# EAGLE board Traffic Light Contoller v10 (EAGLE 5.03)
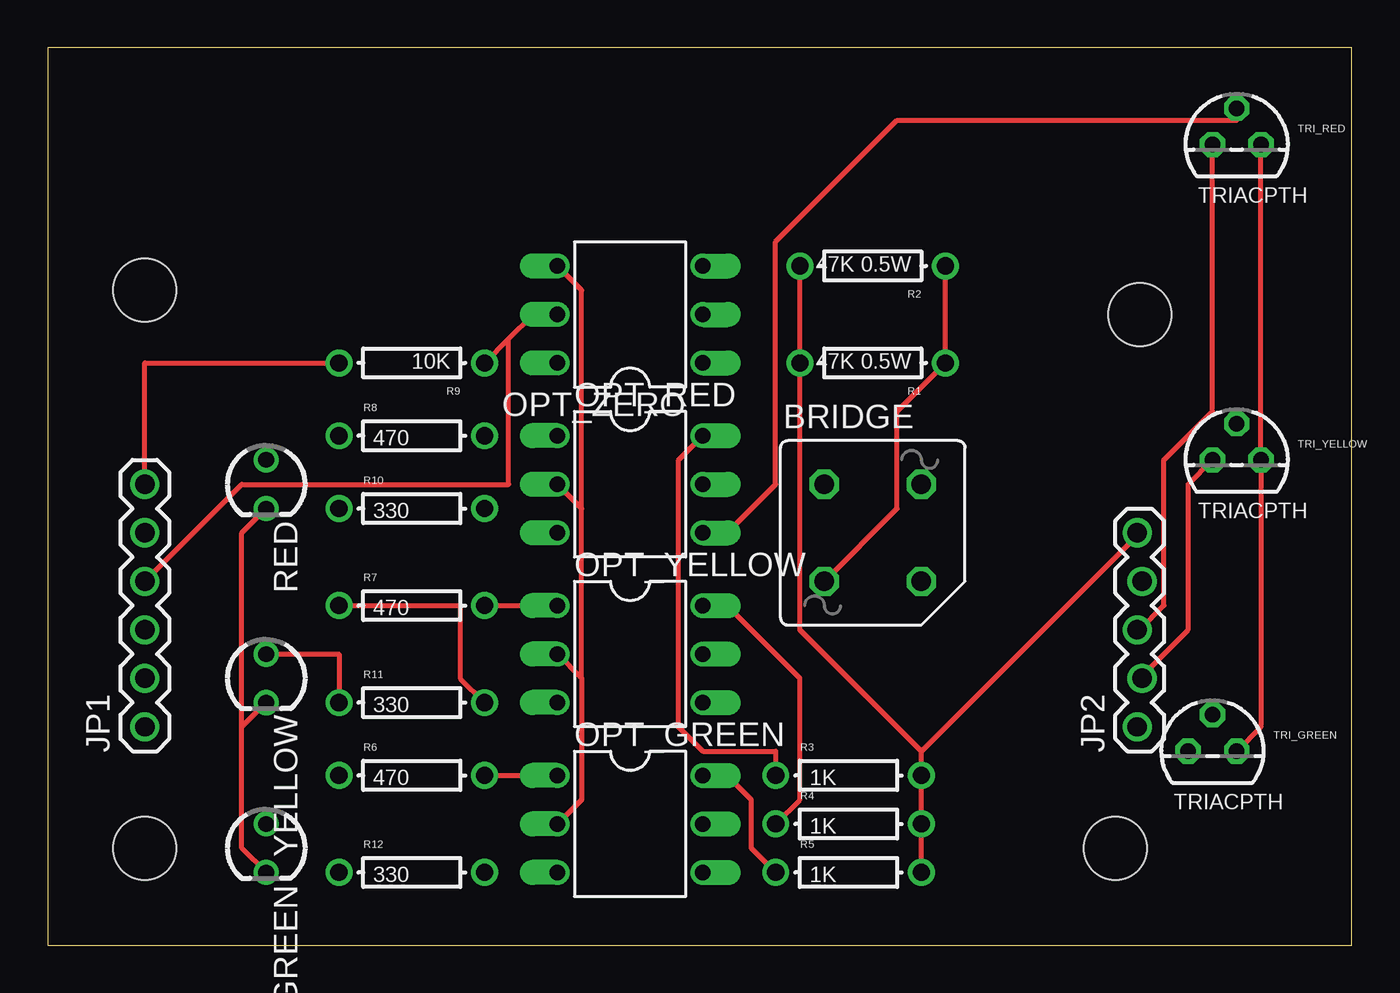
[diagram p0: board, top side]
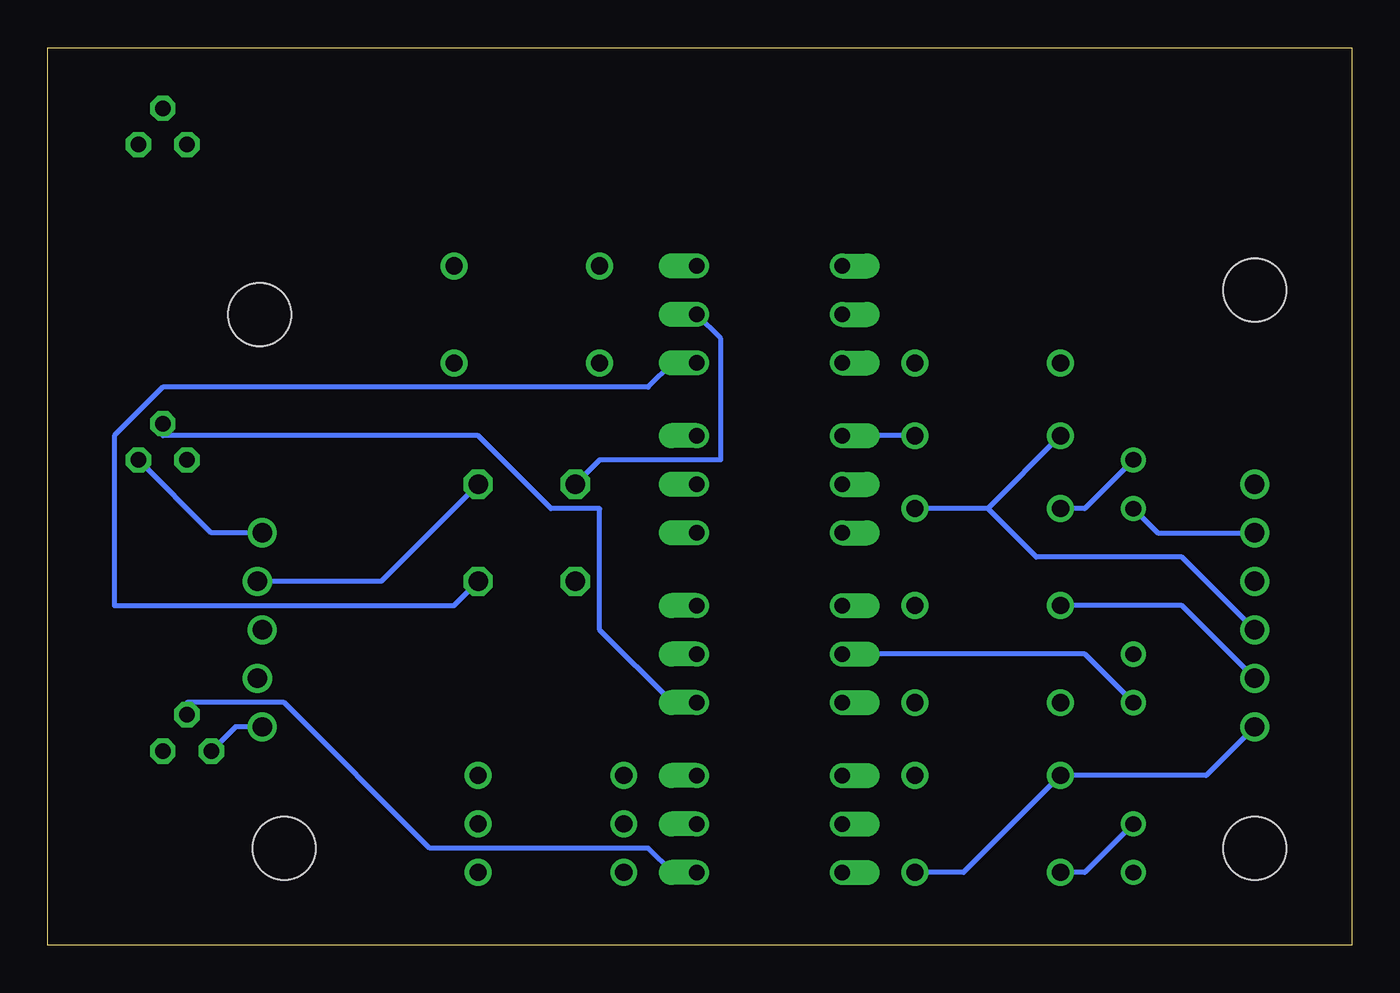
[diagram p1: board, bottom side, seen from below]

Size 68.25 x 46.98 mm. Coordinates in mm from the lower left corner, seen from the top.
Outline: 0,0 68.25,0 68.25,46.98 0,46.98 0,0
Copper layers (1*16): Top 0.035mm / dielectric 1.5mm / Bottom 0.035mm
Design rules "default": minimum track width 10mil, minimum drill 24mil, track to track 8mil, track to pad 8mil, pad to pad 8mil, via to via 8mil, smd to smd 8mil, copper to edge 40mil, drill to drill 8mil, minimum pad ring 10mil, minimum via ring 8mil, stop-mask expansion 4mil, vias tented up to drill 0mil, thermal gap 10mil

## Footprints (pad centres in the part's own frame; a part is rotated, then mirrored left to right if it is on the bottom)
1KAB = drill 1.016 octagon: + 2.54,-2.54; - -2.54,2.54; AC1 -2.54,-2.54; AC2 2.54,2.54
LED3MM = drill 0.813 round: A -1.27,0; K 1.27,0
1X06 = drill 1.016 round: 1 0,0; 2 2.54,0; 3 5.08,0; 4 7.62,0; 5 10.16,0; 6 12.7,0
1X05_LOCK = drill 1.016 round: 1 0,0.127; 2 2.54,-0.127; 3 5.08,0.127; 4 7.62,-0.127; 5 10.16,0.127
DIL06 = drill 0.813 offset: 1 -2.54,-3.81; 2 0,-3.81; 3 2.54,-3.81; 4 2.54,3.81; 5 0,3.81; 6 -2.54,3.81
AXIAL-0.3 = drill 0.9 round: P$1 -3.81,0; P$2 3.81,0
TO-92 = drill 0.813 octagon: 1 -1.27,0; 2 0,1.905; 3 1.27,0
STAND-OFF = hole 3.302: 0,0

## Placement (x,y rotation side)
BRIDGE  1A  [1KAB]  43.18,21.59 0 top
GREEN  [LED3MM]  11.43,5.08 270 top
JP1  [1X06]  5.08,11.43 90 top
JP2  [1X05_LOCK]  57.15,11.43 90 top
OPT_GREEN  MOC3010M  [DIL06]  30.48,6.35 270 top
OPT_RED  MOC3010M  [DIL06]  30.48,24.13 270 top
OPT_YELLOW  MOC3010M  [DIL06]  30.48,15.24 270 top
OPT_ZERO  4N25M  [DIL06]  30.48,33.02 90 top
R1  47K 0.5W  [AXIAL-0.3]  43.18,30.48 180 top
R2  47K 0.5W  [AXIAL-0.3]  43.18,35.56 180 top
R3  1K  [AXIAL-0.3]  41.91,8.89 0 top
R4  1K  [AXIAL-0.3]  41.91,6.35 0 top
R5  1K  [AXIAL-0.3]  41.91,3.81 0 top
R6  470  [AXIAL-0.3]  19.05,8.89 0 top
R7  470  [AXIAL-0.3]  19.05,17.78 0 top
R8  470  [AXIAL-0.3]  19.05,26.67 0 top
R9  10K  [AXIAL-0.3]  19.05,30.48 180 top
R10  330  [AXIAL-0.3]  19.05,22.86 0 top
R11  330  [AXIAL-0.3]  19.05,12.7 0 top
R12  330  [AXIAL-0.3]  19.05,3.81 0 top
RED  [LED3MM]  11.43,24.13 270 top
TRI_GREEN  TRIACPTH  [TO-92]  60.96,10.16 0 top
TRI_RED  TRIACPTH  [TO-92]  62.23,41.91 0 top
TRI_YELLOW  TRIACPTH  [TO-92]  62.23,25.4 0 top
U$1  [STAND-OFF]  57.15,33.02 0 top
U$2  [STAND-OFF]  5.08,34.29 0 top
U$3  [STAND-OFF]  55.88,5.08 0 top
U$6  [STAND-OFF]  5.08,5.08 0 top
YELLOW  [LED3MM]  11.43,13.97 270 top

## Library data of the parts
BRIDGE = rectifier
GREEN JP1 JP2 R1-R12 RED TRI_GREEN TRI_RED TRI_YELLOW U$1-U$3 U$6 YELLOW = SparkFun
OPT_GREEN OPT_RED OPT_YELLOW OPT_ZERO = optocoupler

## Nets
5V: JP1.6 R9.P$2
GND: GREEN.K JP1.5 OPT_GREEN.2 OPT_RED.2 OPT_YELLOW.2 OPT_ZERO.4 RED.K YELLOW.K
GREEN_HOT: JP2.1 TRI_GREEN.1
IN_ZERO: JP1.4 OPT_ZERO.5 R9.P$1
MAIN_HOT: JP2.5 R1.P$2 R2.P$2 R3.P$2 R4.P$2 R5.P$2 TRI_GREEN.3 TRI_RED.3 TRI_YELLOW.3
N$1: BRIDGE.- OPT_ZERO.2
N$2: BRIDGE.+ OPT_ZERO.1
N$3: BRIDGE.AC1 R1.P$1 R2.P$1
N$6: OPT_RED.6 R3.P$1
N$7: OPT_YELLOW.1 R7.P$2
N$8: OPT_GREEN.1 R6.P$2
N$9: OPT_YELLOW.6 R4.P$1
N$10: OPT_GREEN.6 R5.P$1
N$11: R10.P$1 RED.A
N$12: R11.P$1 YELLOW.A
N$13: GREEN.A R12.P$1
N$14: OPT_RED.1 R8.P$2
N$21: OPT_GREEN.4 TRI_GREEN.2
N$22: OPT_YELLOW.4 TRI_YELLOW.2
N$23: OPT_RED.4 TRI_RED.2
NEUTRAL: BRIDGE.AC2 JP2.4
OUT_GREEN: JP1.1 R6.P$1 R12.P$2
OUT_RED: JP1.3 R8.P$1 R10.P$2
OUT_YELLOW: JP1.2 R7.P$1 R11.P$2
RED_HOT: JP2.3 TRI_RED.1
YELLOW_HOT: JP2.2 TRI_YELLOW.1

## Tracks (layer width: path | path; a pad name or v marks a point on that pad's centre or on a via)
5V
  Top 0.254: R9.P$2 5.08,30.48 JP1.6
GND
  Top 0.254: GREEN.K 10.16,5.08 10.16,11.43 | 10.16,11.43 YELLOW.K | RED.K 10.16,21.59 10.16,11.43 | OPT_GREEN.2 27.94,7.62 27.94,13.97 | OPT_YELLOW.2 27.94,13.97 | 27.94,22.86 OPT_RED.2 | 27.94,13.97 27.94,22.86 | OPT_ZERO.4 27.94,34.29 27.94,22.86
  Bottom 0.254: RED.K 10.16,21.59 JP1.5 | YELLOW.K 13.97,15.24 OPT_YELLOW.2
GREEN_HOT
  Bottom 0.254: TRI_GREEN.1 58.42,11.43 JP2.1
IN_ZERO
  Top 0.254: 24.13,31.75 R9.P$1 | 24.13,31.75 25.4,33.02 OPT_ZERO.5 | JP1.4 10.16,24.13 24.13,24.13 24.13,31.75
MAIN_HOT
  Top 0.254: TRI_GREEN.3 63.5,11.43 TRI_YELLOW.3 TRI_RED.3 | R2.P$2 R1.P$2 39.37,16.51 45.72,10.16 | R5.P$2 R4.P$2 R3.P$2 45.72,10.16 | 45.72,10.16 57.15,21.59 JP2.5
  Bottom 0.254: TRI_YELLOW.3 59.69,21.59 JP2.5
N$1
  Bottom 0.254: OPT_ZERO.2 33.02,31.75 33.02,25.4 39.37,25.4 BRIDGE.-
N$2
  Bottom 0.254: BRIDGE.+ 46.99,17.78 64.77,17.78 64.77,26.67 62.23,29.21 36.83,29.21 35.56,30.48 OPT_ZERO.1
N$3
  Top 0.254: R2.P$1 R1.P$1 44.45,27.94 44.45,22.86 BRIDGE.AC1
N$6
  Top 0.254: OPT_RED.6 33.02,25.4 33.02,11.43 34.29,10.16 38.1,10.16 R3.P$1
N$7
  Top 0.254: R7.P$2 OPT_YELLOW.1
N$8
  Top 0.254: R6.P$2 OPT_GREEN.1
N$9
  Top 0.254: R4.P$1 39.37,7.62 39.37,13.97 35.56,17.78 OPT_YELLOW.6
N$10
  Top 0.254: R5.P$1 36.83,5.08 36.83,7.62 35.56,8.89 OPT_GREEN.6
N$11
  Bottom 0.254: RED.A 13.97,22.86 R10.P$1
N$12
  Top 0.254: YELLOW.A 15.24,15.24 R11.P$1
N$13
  Bottom 0.254: GREEN.A 13.97,3.81 R12.P$1
N$14
  Bottom 0.254: R8.P$2 OPT_RED.1
N$21
  Bottom 0.254: OPT_GREEN.4 35.56,3.81 36.83,5.08 48.26,5.08 55.88,12.7 60.96,12.7 TRI_GREEN.2
N$22
  Bottom 0.254: OPT_YELLOW.4 35.56,12.7 39.37,16.51 39.37,22.86 41.91,22.86 45.72,26.67 62.23,26.67 TRI_YELLOW.2
N$23
  Top 0.254: OPT_RED.4 35.56,21.59 38.1,24.13 38.1,36.83 44.45,43.18 62.23,43.18 TRI_RED.2
NEUTRAL
  Bottom 0.254: BRIDGE.AC2 50.8,19.05 JP2.4
OUT_GREEN
  Bottom 0.254: R12.P$2 20.32,3.81 R6.P$1 7.62,8.89 JP1.1
OUT_RED
  Bottom 0.254: 19.05,22.86 R8.P$1 | 19.05,22.86 R10.P$2 | JP1.3 8.89,20.32 16.51,20.32 19.05,22.86
OUT_YELLOW
  Top 0.254: R7.P$1 21.59,17.78 21.59,13.97 R11.P$2
  Bottom 0.254: JP1.2 8.89,17.78 R7.P$1
RED_HOT
  Top 0.254: TRI_RED.1 60.96,27.94 58.42,25.4 58.42,17.78 57.15,16.51 JP2.3
YELLOW_HOT
  Top 0.254: TRI_YELLOW.1 59.69,24.13 59.69,16.51 57.15,13.97 JP2.2